# Altium PCB Mixer.PcbDoc
Units mm, origin at the board's own origin, x right, y up, seen from the top; angles counter-clockwise.
Board outline 110 x 25 mm, 2 copper layers (Top Layer, Bottom Layer); 69 components, 30 nets, 127 pads, 102 vias.
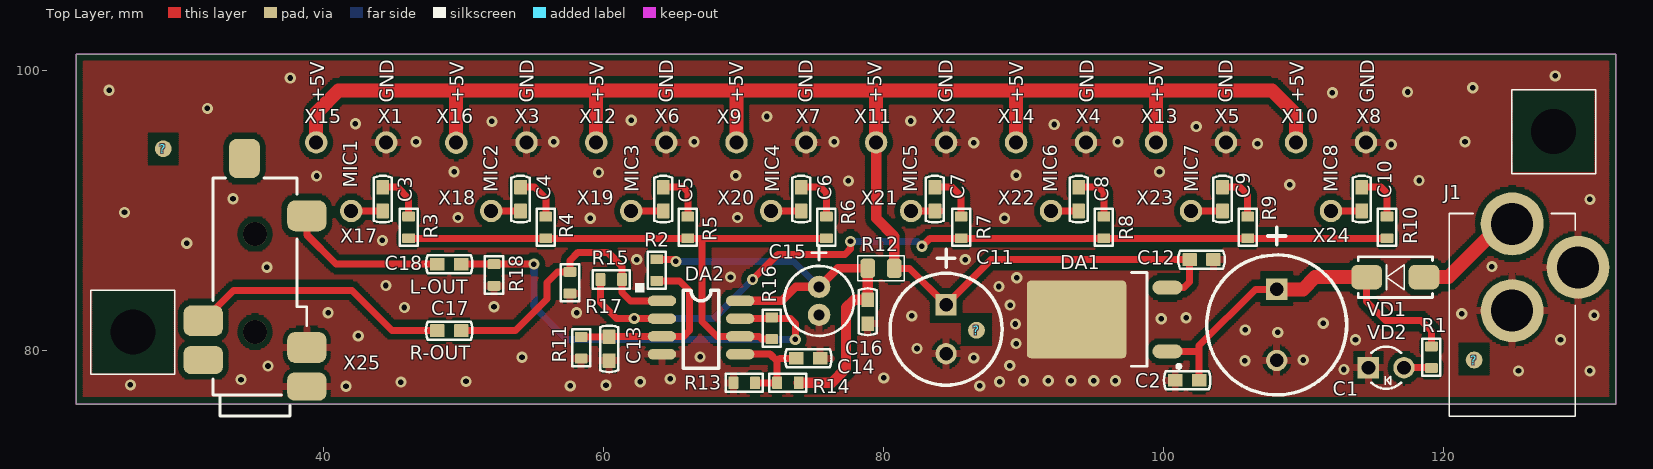
[diagram p0: Top Layer view]
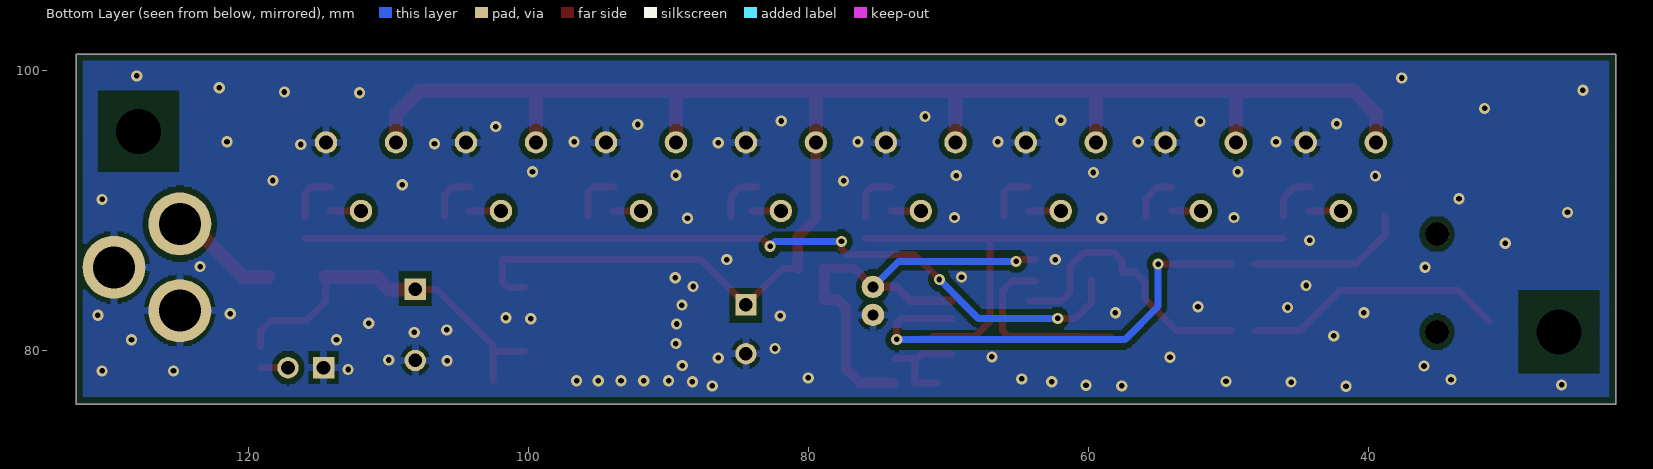
[diagram p1: Bottom Layer view, seen from below]

## Layer stack, top to bottom
Top Solder: solder mask 0.0102, Solder Resist, Dk 3.5
Top Layer: signal copper 0.0356
Dielectric 1: dielectric 0.32, FR-4, Dk 4.8
Bottom Layer: signal copper 0.0356
Bottom Solder: solder mask 0.0102, Solder Resist, Dk 3.5

## Board outline
22.3,76.2 22.3,101.2 132.3,101.2 132.3,76.2

## Design rules (kind name [scope] priority, off if disabled: settings)
Clearance [All] p1: gap=0.4
ComponentClearance [All] p1: gap=0 collisioncheckmode=3 verticalgap=2540 showdistances=FALSE
HoleSize [All] p1: absolutevalues=TRUE maxlimit=5 minlimit=0.025 maxpercent=80.000 minpercent=20.000
MinimumSolderMaskSliver [All] p1: minsoldermaskwidth=0.1
PolygonConnect PolygonConnect_2 [IsVia] p1: connectstyle=Direct reliefconductorwidth=0.254 reliefentries=4 polygonreliefangle="90 Angle" airgapwidth=0.254
PolygonConnect PolygonConnect_1 [InComponent('DA1')] p2: connectstyle=Direct reliefconductorwidth=0.254 reliefentries=4 polygonreliefangle="90 Angle" airgapwidth=0.254
PolygonConnect [All] p3: connectstyle=Relief reliefconductorwidth=0.5 reliefentries=4 polygonreliefangle="90 Angle" airgapwidth=0.3
RoutingVias [All] p1: holewidth=0.4 width=0.8 viastyle="Through Hole" minholewidth=0.3 minwidth=0.6 maxholewidth=0.5 maxwidth=1
SilkToSilkClearance [All] p1: silktosilkclearance=0.15
SilkToSolderMaskClearance [IsPad] p1: minsilkscreentomaskgap=0.1 clearancetoexposedcopper=TRUE
SolderMaskExpansion [All] p1: expansion=0.102
Width [All] p1: maxlimit=2 minlimit=0.2 preferedwidth=0.5
25 further rules are at their usual default settings.

## Components (designator, comment, footprint, x,y, rotation, side; value= is the part's Value field where it differs from the comment)
? "REPER1.2" REPER1.2 122.175,79.35 r90 top
? "REPER1.2" REPER1.2 28.525,94.45 r90 top
? "REPER1.2" REPER1.2 86.625,81.475 r90 top
C1 "470uFx25V" CC16X10_CAP0.5(1)(Primary) 108.075,84.4 r270 top
C2 "0.1uFx50V" CC0603-3M 101.675,77.9 r0 top
C3 "0.1uFx50V" CC0603-3M 44.2,90.85 r90 top
C4 "0.1uFx50V" CC0603-3M 54.05,90.85 r90 top
C5 "0.1uFx50V" CC0603-3M 64.25,90.85 r90 top
C6 "0.1uFx50V" CC0603-3M 74.1,90.85 r90 top
C7 "0.1uFx50V" CC0603-3M 83.65,90.85 r90 top
C8 "0.1uFx50V" CC0603-3M 93.925,90.85 r90 top
C9 "0.1uFx50V" CC0603-3M 104.2,90.85 r90 top
C10 "0.1uFx50V" CC0603-3M 114.15,90.85 r90 top
C11 "220uFx16V" CC8X3.5 84.45,83.3 r270 top
C12 "0.1uFx50V" CC0603-3M 102.7,86.525 r180 top
C13 "1uFx50V" CC0603-3M 60.375,80.15 r90 top
C14 "1uFx50V" CC0603-3M 74.6,79.475 r180 top
C15 "10uFx16V" Cap_5x8 75.375,82.575 r90 top
C16 "0.1uFx50V" CC0603-3M 78.85,82.8 r90 top
C17 "0.1uFx50V" CC0603-3M 48.95,81.45 r180 top
C18 "0.1uFx50V" CC0603-3M 48.95,86.2 r180 top
DA1 "MC78M05CDTRK" D-PAK(TO-252AA) 95.775,82.25 r180 top
DA2 "LM358D" SO-8 64.15,83.575 r270 top
J1 "DCJ25" DCJ25 129.6,85.975 r90 top
R1 "1k" RC0603-3M 119.125,79.55 r270 top
R2 "12k" RC0603-3M 63.775,85.775 r270 top
R3 "12k" RC0603-3M 46.05,88.825 r270 top
R4 "12k" RC0603-3M 55.85,88.825 r270 top
R5 "12k" RC0603-3M 66,88.825 r270 top
R6 "12k" RC0603-3M 75.9,88.825 r270 top
R7 "12k" RC0603-3M 85.525,88.825 r270 top
R8 "12k" RC0603-3M 95.725,88.825 r270 top
R9 "12k" RC0603-3M 106,88.825 r270 top
R10 "12k" RC0603-3M 115.95,88.825 r270 top
R11 "12k" RC0603-3M 58.375,80.225 r270 top
R12 "10E" RC0805_IPC_NOM 79.8,85.9 r180 top
R13 "12k" RC0603-3M 70.025,77.725 r180 top
R14 "12k" RC0603-3M 73.15,77.725 r0 top
R15 "12k" RC0603-3M 60.525,85.1 r0 top
R16 "12k" RC0603-3M 72,81.625 r90 top
R17 "12k" RC0603-3M 57.575,84.875 r270 top
R18 "12k" RC0603-3M 52.15,85.425 r270 top
VD1 "GS1M" SMA 116.55,85.275 r180 top
VD2 "GNL-3014HD" LED3 114.625,78.8 r0 top
X1 "PIN_1mm" PIN_1mm 44.45,94.9 r0 top
X2 "PIN_1mm" PIN_1mm 84.45,94.9 r0 top
X3 "PIN_1mm" PIN_1mm 54.475,94.9 r0 top
X4 "PIN_1mm" PIN_1mm 94.45,94.9 r0 top
X5 "PIN_1mm" PIN_1mm 104.45,94.9 r0 top
X6 "PIN_1mm" PIN_1mm 64.45,94.9 r0 top
X7 "PIN_1mm" PIN_1mm 74.45,94.9 r0 top
X8 "PIN_1mm" PIN_1mm 114.45,94.9 r90 top
X9 "PIN_1mm" PIN_1mm 69.475,94.9 r0 top
X10 "PIN_1mm" PIN_1mm 109.45,94.9 r0 top
X11 "PIN_1mm" PIN_1mm 79.45,94.9 r0 top
X12 "PIN_1mm" PIN_1mm 59.45,94.9 r0 top
X13 "PIN_1mm" PIN_1mm 99.45,94.9 r0 top
X14 "PIN_1mm" PIN_1mm 89.45,94.9 r0 top
X15 "PIN_1mm" PIN_1mm 39.45,94.9 r0 top
X16 "PIN_1mm" PIN_1mm 49.45,94.875 r0 top
X17 "PIN_1mm" PIN_1mm 41.95,90 r90 top
X18 "PIN_1mm" PIN_1mm 51.95,90 r90 top
X19 "PIN_1mm" PIN_1mm 61.95,90 r90 top
X20 "PIN_1mm" PIN_1mm 71.95,90 r90 top
X21 "PIN_1mm" PIN_1mm 81.95,90 r0 top
X22 "PIN_1mm" PIN_1mm 91.95,90 r0 top
X23 "PIN_1mm" PIN_1mm 101.95,90 r0 top
X24 "PIN_1mm" PIN_1mm 111.95,90 r0 top
X25 "SJ-43516-SMT" SJ-43516-SMT 38.775,77.45 r90 top

## Footprints (in the part's own frame and the unit in brackets; to place one, negate y for a bottom-side part, rotate by r counter-clockwise, add the part's x,y. Pads: shape width x height; smd on the part's side, far side on the other; paste and mask are expansions set on the pad)
Cap_5x8 [mm]
  round 1.6 hole 0.8: +(2,0) -(0,0)
  silkscreen extent -1.5,-2.5 4.95,2.5
CC8X3.5 [mil]
  rect 60x60 hole 38: 1(0,0)
  round 60 hole 38: 2(137.8,0)
  silkscreen extent -156,-157 226,157
CC16X10_CAP0.5(1)(Primary) [mil]
  round 60 hole 38: 1(200,0)
  rect 60x60 hole 38: 2(0,0)
  silkscreen extent -175,-197 297,197
CC0603-3M [mil]
  rrect10% 40.98x35.98 smd paste-1000: 1(-33.5,0) 2(33.5,0)
  silkscreen extent -65,-26 65,26
D-PAK(TO-252AA) [mm]
  oval 2.15x1 smd: 1(-4.5,2.28) 2(-4.5,-2.28)
  rrect10% 7.1x5.55 smd: 3(2,0)
  silkscreen extent -5.42,-3.35 -1.92,3.47
DCJ25 [mm]
  round 4.5 hole 3: 1(-3.1,4.7) 2(0,0) 3(3.1,4.7)
  silkscreen extent -10.65,0.2 3.84,9.2
LED3 [mil]
  rect 60x60 hole 39: 1(0,0)
  round 60 hole 39: 2(100,0)
  silkscreen extent 8,-59 92,59
PIN_1mm [mm]
  round 1.6 hole 1: 1(0,0)
RC0603-3M [mm]
  rrect20% 0.71x0.91 smd paste-25.4: 1(-0.775,0) 2(0.775,0)
  silkscreen extent -1.32,-0.65 1.33,0.65
RC0805_IPC_NOM [mm]
  rrect50% 1.05x1.4 smd: 1(-0.95,0) 2(0.95,0)
  silkscreen extent -1.67,-0.89 1.67,0.89
REPER1.2 [mm]
  round 1.2 smd paste-25.4 mask-25.4: 1(0,0)
  Top Layer pour cut-out: -1.2,-1.2 1.2,-1.2 1.2,1.2 -1.2,1.2
SJ-43516-SMT [mm]
  rrect50% 2x2.8 smd: 1(0,0) 6(1.9,7.4)
  rrect50% 2.2x2.8 smd: 2(12.2,0) 3(4.7,7.4) 4(2.8,0)
  rrect50% 2.8x2.2 smd: 5(16.3,4.45)
  round 1.7 hole 1.7 unplated: 7(3.9,3.7) 8(10.9,3.7)
  silkscreen extent -2.1,0 14.9,6.7
SMA [mm]
  rrect50% 2.2x1.75 smd: 1(-2.05,0) 2(2.05,0)
  silkscreen extent -2.65,-1.45 2.65,1.45
SO-8 [mil]
  oval 29.53x80 smd: 1(0,0) 2(50,0) 3(100,0) 4(150,0) 5(150,220) 6(100,220) 7(50,220) 8(0,220)
  silkscreen extent -50,-75 190,160

## Part data
C1: library part CAP0.5(1), "Jamicon TKR"
C2 C3 C4 C5 C6 C7 C8 C9 C10 C12 C13 C14 C16 C17 C18: library part CC0603, "CC0603 X7R"
C11: library part CAP0.35, "CAP0.35"
C15: library part Cap_5x8, "Jamicon TKR"
R1 R2 R3 R4 R5 R6 R7 R8 R9 R10 R11 R13 R14 R15 R16 R17 R18: library part RC0603, "RC0603"
R12: library part RC0805, "RC0805"
VD2: library part LED_3, "LED_3"
X25: "3.5mm connector 4 conductors"

## Free pads (board coordinates)
  round 2.5 hole 3.2: 0(26.35,81.35) 0(127.85,95.675)

## Via types
v1: diameter 0.8, hole 0.4, Top Layer to Bottom Layer, 102 vias

## Nets (pads, with @x,y where several pads share a name; then routed paths per layer and width w, separated by ;. In a path a pad name is that pad's centre, name@x,y a point inside that pad or via, vN(x,y) a via of type N, cw(c..) or ccw(c..) an arc to the next point about the centre after c; other vN are vias at no path point)
+12V: C1.2 C2.2 DA1.1 R1.1 VD1.2 | length 27.1
  Top Layer w0.5: DA1.1 102.496,79.97 102.526,80 ; C2.2 102.526,80 ; C1.2 106.55,84.4 102.526,80.376 102.526,80 ; VD1.2 114.5,83.525 115.85,82.175 118.375,82.175 119.125,81.425 R1.1
  Top Layer w1: C1.2 109.95,84.4 110.825,85.275 VD1.2
GND: C1.1 C2.1 C11.2 C12.1 C13.1 C14.1 C15.- C16.1 DA1.3 DA2.4 J1.1 J1.2 R11.2 R13.2 R17.2 R18.2 VD2.1 X1.1 X2.1 X3.1 X4.1 X5.1 X6.1 X7.1 X8.1 X25.1 X25.4
  other v1: 41.575,77.475 57.6,77.5 86.85,77.5 60.15,77.55 26.175,77.575 45.5,77.775 62.6,77.8 88.275,77.8 50.15,77.825 89.975,77.875 91.75,77.875 93.375,77.875 95,77.875 96.55,77.875 34.075,77.95 64.75,78 80,78.075 125.35,78.575 130.45,78.575 112.875,78.675 36,78.925 89,78.95 105.8,79.3 109.975,79.35 86.425,79.5 54.15,79.55 66.875,79.575 82.375,80.175 89.45,80.525 113.7,80.8 128.35,80.8 42.45,81.075 108.15,81.325 105.825,81.5 89.4,81.925 111.4,81.975 99.825,82.3 101.6,82.375 82,82.5 130.75,82.55 121.3,82.65 40.3,82.725 58.05,82.725 45.75,83.1 52.15,83.15 89.025,83.275 88.225,84.6 44.425,84.675 89.5,85.225 69.05,85.275 35.925,85.975 123.45,86.025 62.35,86.525 85.825,86.525 30.2,87.7 44.175,87.9 59.025,89.475 88.625,89.475 49.575,89.525 69.55,89.525 25.75,89.9 130.45,90.825 33.5,90.875 109,91.875 77.475,92.15 118.25,92.175 39.475,92.5 69.425,92.525 89.45,92.55 59.625,92.75 49.3,92.8 99.7,92.8 116.25,94.75 106.7,94.8 86.425,94.875 46.575,94.95 56.425,94.95 66.45,94.95 76.45,94.95 96.725,94.95 121.525,94.95 102.325,96.025 92.175,96.175 42.25,96.225 52,96.4 81.925,96.425 61.95,96.475 71.65,96.75 31.675,97.325 112.05,98.45 117.425,98.5 24.65,98.625 122.075,98.8 37.6,99.5 127.975,99.65
NetC3_1: C3.1 X17.1 | length 2.3
  Top Layer w0.5: X17.1 44.199,90 C3.1
NetC3_2: C3.2 R3.1 | length 3.5
  Top Layer w0.5: C3.2 45.249,91.701 46.05,90.9 R3.1
NetC4_1: C4.1 X18.1 | length 2.1
  Top Layer w0.5: X18.1 54.049,90 C4.1
NetC4_2: C4.2 R4.1 | length 3.4
  Top Layer w0.5: C4.2 55.049,91.701 55.85,90.9 R4.1
NetC5_1: C5.1 X19.1 | length 2.3
  Top Layer w0.5: X19.1 C5.1 C5.1
NetC5_2: C5.2 R5.1 | length 3.6
  Top Layer w0.5: C5.2 65.649,91.701 66,91.35 R5.1
NetC6_1: C6.1 X20.1 | length 2.1
  Top Layer w0.5: X20.1 C6.1
NetC6_2: C6.2 R6.1 | length 3.7
  Top Layer w0.5: C6.2 75.474,91.701 75.9,91.275 R6.1
NetC7_1: C7.1 X21.1 | length 2.1
  Top Layer w0.5: X21.1 84.049,90 C7.1@84.05,89.999
NetC7_2: C7.2 R7.1 | length 3.6
  Top Layer w0.5: C7.2 84.874,91.701 85.525,91.05 R7.1@85.525,89.575
NetC8_1: C8.1 X22.1 | length 2
  Top Layer w0.5: X22.1 C8.1 C8.1
NetC8_2: C8.2 R8.1 | length 3.7
  Top Layer w0.5: C8.2 95.349,91.701 95.725,91.325 R8.1
NetC9_1: C9.1 X23.1 | length 2.3
  Top Layer w0.5: X23.1 104.199,90 C9.1
NetC9_2: C9.2 R9.1 | length 3.6
  Top Layer w0.5: C9.2 105.449,91.701 106,91.15 R9.1
NetC10_1: C10.1 X24.1 | length 2.2
  Top Layer w0.5: X24.1 C10.1 C10.1
NetC10_2: C10.2 R10.1 | length 3.7
  Top Layer w0.5: C10.2 115.524,91.701 115.95,91.275 R10.1
NetC13_2: C13.2 DA2.3 R2.2 R11.1 | length 13.4
  Top Layer w0.5: R11.1 58.376,81.001 C13.2 60.409,81.035 DA2.3 65.71,81.035 66.125,81.45 66.125,84.275 65.4,85 R2.2
NetC14_2: C14.2 DA2.5 R13.1 R14.1 | length 7.4
  Top Layer w0.5: DA2.5 71.885,79.765 72.375,79.275 ; R13.1 R14.1 72.375,79.275 ; C14.2 72.576,79.475 72.375,79.275
NetC17_1: C17.1 DA2.1 R15.2 R17.1 | length 20.4
  Top Layer w0.5: C17.1 53.675,81.45 55.925,83.7 55.925,84.875 56.7,85.65 R17.1 57.575,86.475 58.15,87.05 60.275,87.05 61.3,86.025 R15.2 61.3,84.175 61.9,83.575 DA2.1
NetC17_2: C17.2 X25.3 | length 18.8
  Top Layer w0.5: X25.3 33.55,84.325 42,84.325 44.875,81.45 C17.2
NetC18_1: C18.1 DA2.7 R16.2 R18.1 | length 33.1
  Top Layer w0.5: C18.1@49.826,86.2 R18.1 v1@55,86.2 ; DA2.7 72.02,82.305 72.025,82.3 73.325,82.3 73.675,81.95 v1(73.675,80.825)
  Bottom Layer w0.5: v1(55,86.2) 55,83.175 57.35,80.825 v1(73.675,80.825)
NetC18_2: C18.2 X25.2 | length 11.6
  Top Layer w0.5: X25.2 38.775,88.3 40.875,86.2 C18.2@48.124,86.2
NetDA2_2: DA2.2 R7.2 R8.2 R9.2 R10.2 R15.1 | length 63.3
  Top Layer w0.5: R15.1 59.75,83.45 60.895,82.305 DA2.2 ; v1(70.625,85.1) 72.425,86.9 77.225,86.9 77.625,87.3 v1(77.625,87.825) ; v1(82.725,87.475) 83.3,88.05 R7.2 R8.2 R9.2 R10.2
  Bottom Layer w0.5: v1(62.175,82.325) 67.85,82.325 v1(70.625,85.1) ; v1(77.625,87.825) 82.375,87.825 v1(82.725,87.475)
NetDA2_6: DA2.6 R3.2 R4.2 R5.2 R6.2 R16.1 | length 41.3
  Top Layer w0.5: R3.2 R4.2 R5.2 67.05,88.05 ; R16.1 71.275,80.85 71.09,81.035 DA2.6 68.09,81.035 67.025,82.1 67.025,88.025 67.05,88.05 ; R6.2 67.05,88.05
NetJ1_3: J1.3 VD1.1 | length 7.9
  Top Layer w1: VD1.1 120.35,85.275 124.15,89.075 J1.3
NetR1_2: R1.2 VD2.2 | length 2
  Top Layer w0.5: VD2.2 119.1,78.8 R1.2
VCC: C15.+ C16.2 DA2.8 R2.1 R12.2 R14.2 | length 34.7
  Top Layer w0.5: R2.1 65,86.55 v1(65.15,86.4)
  Top Layer w0.6: DA2.8 72.7,83.575 73.7,84.575 C15.+ 76.7,85.9 R12.2
  Top Layer w0.75: R14.2 76.275,77.725 77.3,78.75 77.3,83.075 77.876,83.651 C16.2 R12.2
  Bottom Layer w0.5: v1(65.15,86.4) 73.55,86.4 C15.+
VCC_NF: C11.1 C12.2 DA1.2 R12.1 X9.1 X10.1 X11.1 X12.1 X13.1 X14.1 X15.1 X16.1 | length 134.3
  Top Layer w0.5: R12.1 81.85,85.9 C11.1 87.675,86.525 C12.2 101.849,84.924 101.455,84.53 DA1.2
  Top Layer w0.75: X11.1 79.45,89.475 80.75,88.175 R12.1
  Top Layer w1: X15.1 39.45,97 41.05,98.6 49.5,98.6 ; X16.1 49.45,98.55 49.5,98.6 ; X12.1 59.45,98.3 59.75,98.6 ; X9.1 69.475,98.575 69.45,98.6 ; X11.1 79.45,98.5 79.35,98.6 ; X14.1 89.45,98.475 89.325,98.6 ; X13.1 99.45,98.55 99.5,98.6 ; X10.1 109.45,96.9 107.75,98.6 99.5,98.6 ; 49.5,98.6 59.75,98.6 ; 59.75,98.6 69.45,98.6 ; 69.45,98.6 79.35,98.6 ; 79.35,98.6 89.325,98.6 ; 89.325,98.6 99.5,98.6
pads on no net: ?.1 X25.5 X25.6 X25.7 X25.8

## Polygon pours and split planes (outlines as drawn)
GND on Top Layer "TOP" (hatched Horizontal grid 0.15 track 0.2, remove dead copper, pour order 5): 22.3,101.2 132.3,101.2 132.3,76.2 22.3,76.2
GND on Bottom Layer "BOT" (hatched Horizontal grid 0.15 track 0.2, remove dead copper, pour order 7): 22.3,101.2 132.3,101.2 132.3,76.2 22.3,76.2

## Keep-outs
Keep-Out Layer:
  the board outline again, w0.1

## Other copper
Top Layer:
  pour cut-out: 23.35,84.35 29.35,84.35 29.35,78.375 23.35,78.375
  pour cut-out: 124.85,98.675 130.85,98.675 130.85,92.7 124.85,92.7
Bottom Layer:
  pour cut-out: 23.35,84.35 29.35,84.35 29.35,78.375 23.35,78.375
  pour cut-out: 124.85,98.675 130.85,98.675 130.85,92.7 124.85,92.7

## Silkscreen, mask and mechanical layers (free items; w line width, h text height)
Top Overlay:
  lines w0.1: 23.35,78.35 29.35,78.35 29.35,84.35 23.35,84.35 23.35,78.35 ; 124.85,92.675 124.85,98.675 130.85,98.675 130.85,92.675 124.85,92.675
  text "+5V" at 40.025,97.725 h1 r90
  text "GND" at 44.975,97.725 h1 r90
  text "+5V" at 50,97.725 h1 r90
  text "GND" at 55,97.725 h1 r90
  text "+5V" at 59.975,97.725 h1 r90
  text "GND" at 64.95,97.725 h1 r90
  text "+5V" at 69.975,97.725 h1 r90
  text "GND" at 74.925,97.725 h1 r90
  text "+5V" at 79.85,97.725 h1 r90
  text "GND" at 84.925,97.725 h1 r90
  text "+5V" at 89.95,97.725 h1 r90
  text "GND" at 95,97.725 h1 r90
  text "+5V" at 99.95,97.725 h1 r90
  text "GND" at 104.925,97.725 h1 r90
  text "+5V" at 110,97.725 h1 r90
  text "GND" at 115.05,97.725 h1 r90
  text "MIC1" at 42.375,91.658 h1 r90
  text "MIC2" at 52.425,91.325 h1 r90
  text "MIC3" at 62.5,91.325 h1 r90
  text "MIC4" at 72.525,91.325 h1 r90
  text "MIC5" at 82.375,91.325 h1 r90
  text "MIC6" at 92.4,91.325 h1 r90
  text "MIC7" at 102.45,91.325 h1 r90
  text "MIC8" at 112.425,91.325 h1 r90
  text "L-OUT" at 46.125,84.075 h1
  text "R-OUT" at 46.125,79.375 h1

## Dimensions
22.3,101.2 to 132.3,101.2 on Mechanical 1
132.3,101.2 to 132.3,76.2 on Mechanical 1